# Altium PCB Relay Board PCB.PcbDoc
Units mm, origin at the board's own origin, x right, y up, seen from the top; angles counter-clockwise.
Board outline 51 x 30 mm, 2 copper layers (Top Layer, Bottom Layer); 4 components, 4 nets, 10 pads, 0 vias.
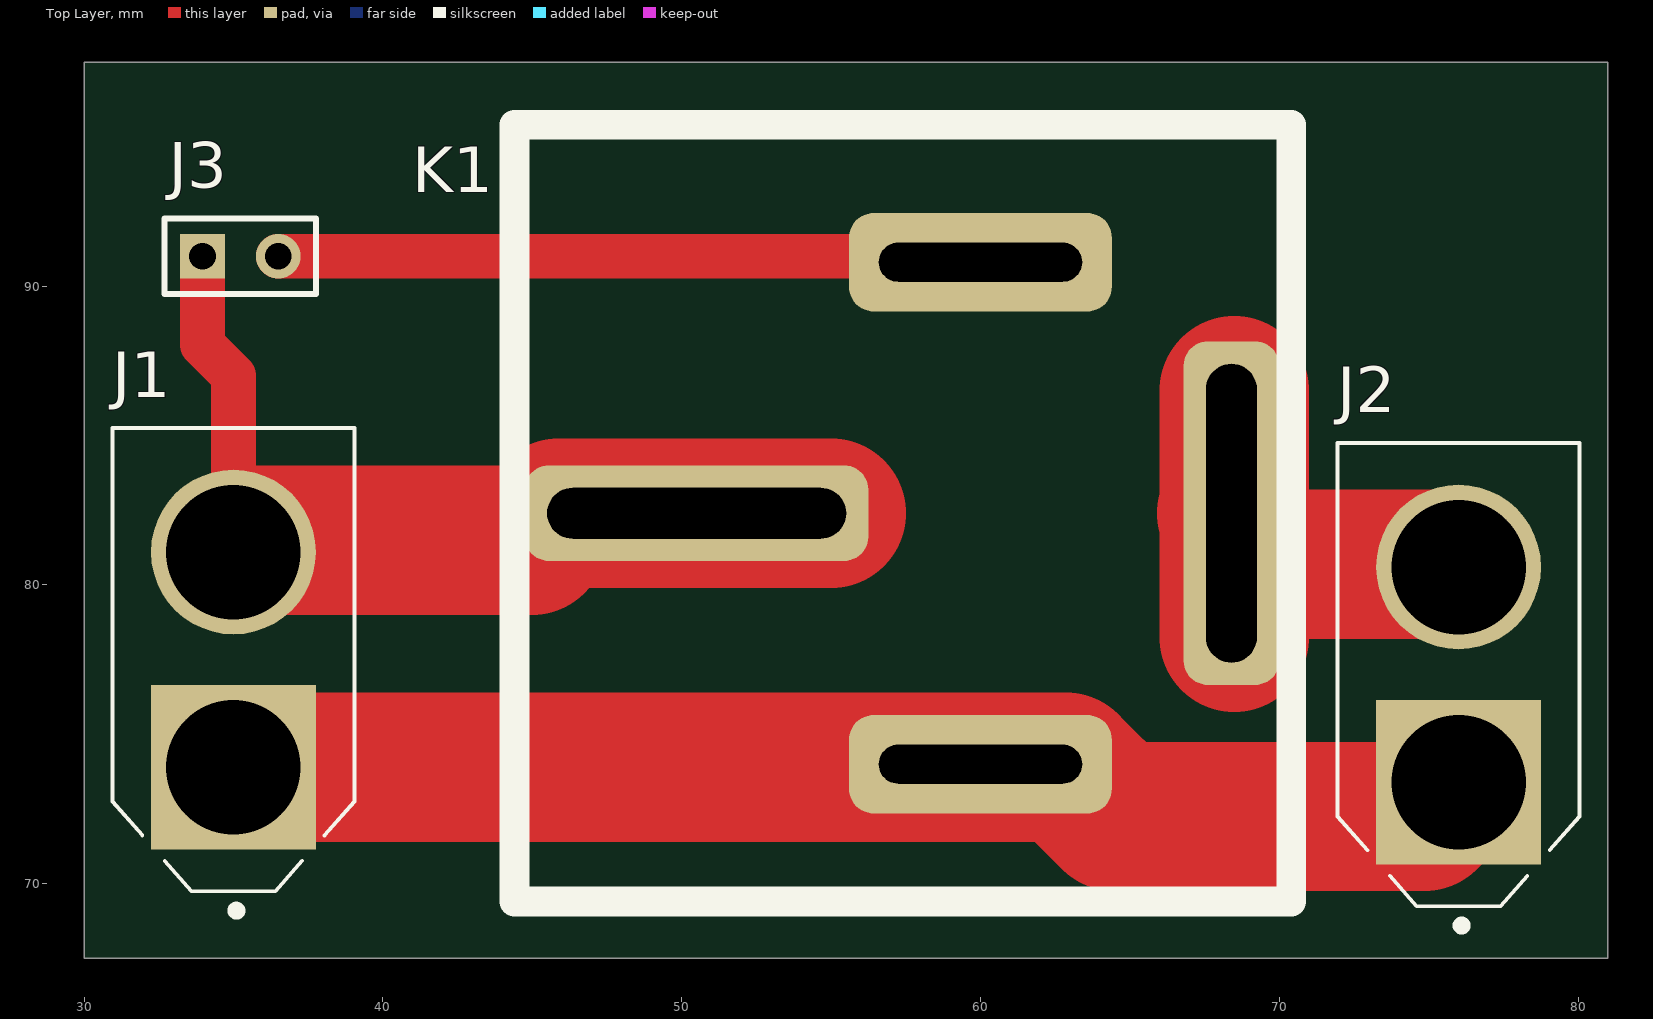
[diagram p0: Top Layer view]
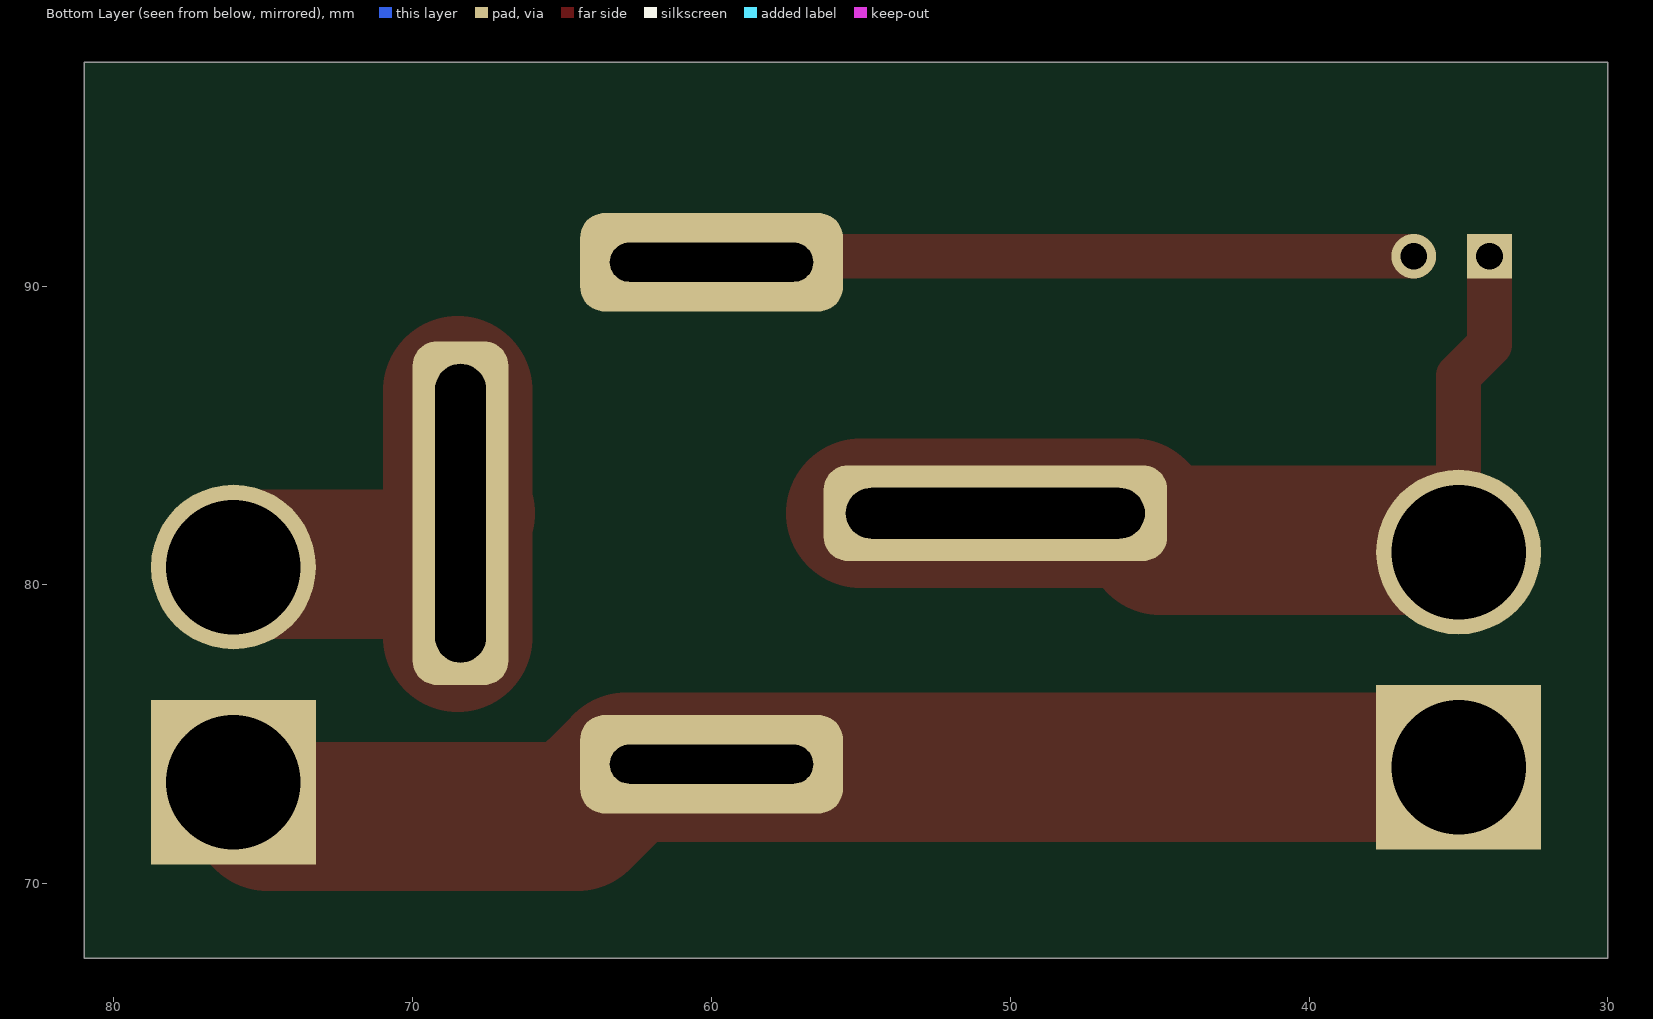
[diagram p1: Bottom Layer view, seen from below]
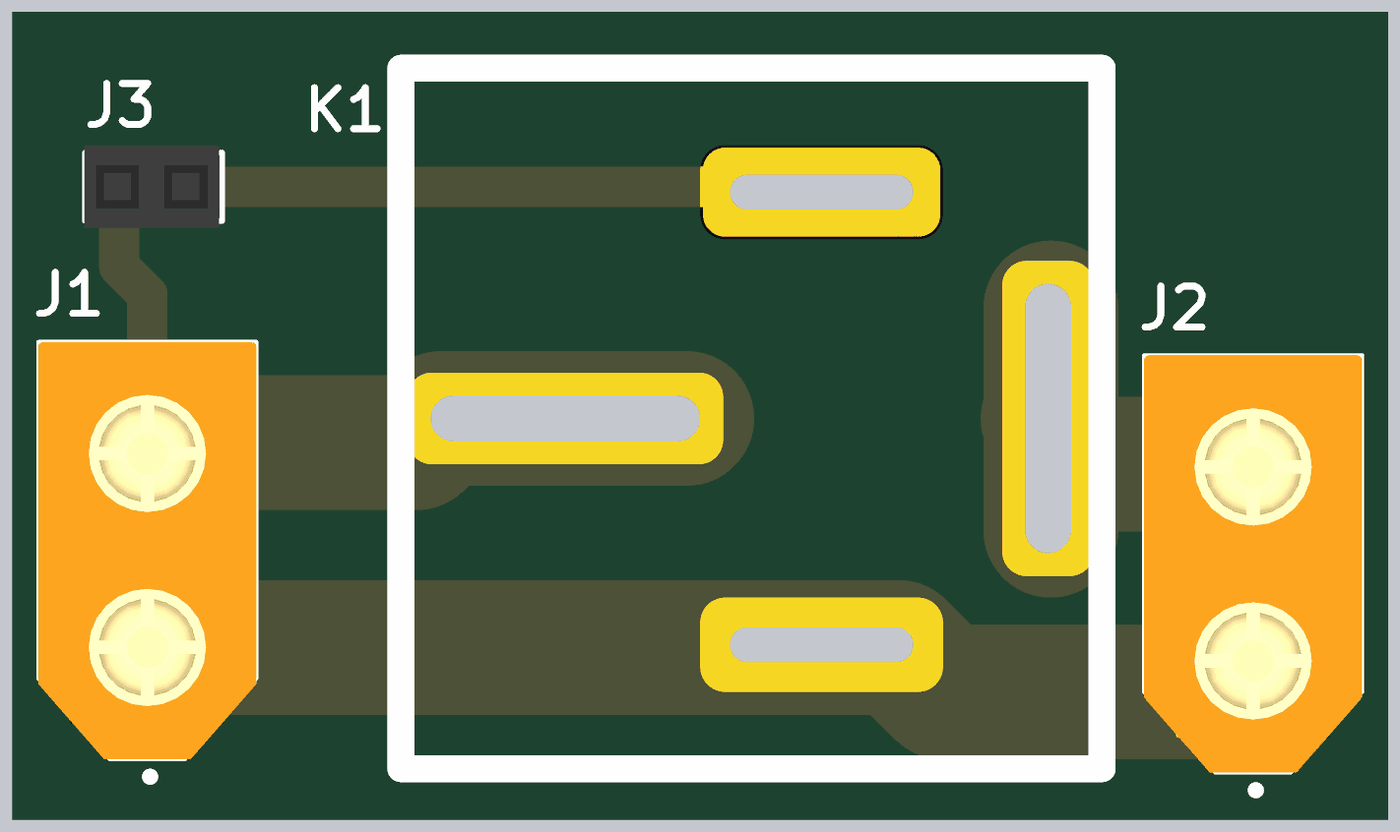
[diagram p2: 3D render of the assembled board from above, using the file's embedded part models]

## Layer stack, top to bottom
Top Solder: solder mask 0.0102, Solder Resist, Dk 3.5
Top Layer: signal copper 0.0356
Dielectric 1: dielectric 0.32, FR-4, Dk 4.8
Bottom Layer: signal copper 0.0356
Bottom Solder: solder mask 0.0102, Solder Resist, Dk 3.5

## Board outline
30,67.5 30,97.5 81,97.5 81,67.5

## Design rules (kind name [scope] priority, off if disabled: settings)
Clearance [All] p1: gap=0.254 ignorepadtopadclearanceinfootprint=FALSE except(0: Arc-Hole Track-Hole SMDPad-Hole THPad-Hole Via-Hole Fill-Hole Poly-Hole Region-Hole Text-Hole)
Height [All] p1: minheight=0 maxheight=50.8 prefheight=12.7
PolygonConnect [All] p1: connectstyle=Direct reliefconductorwidth=0.254 reliefentries=4 polygonreliefangle="90 Angle" airgapwidth=0.254
RoutingVias [All] p1: holewidth=0.711 width=1.27 viastyle="Through Hole" minholewidth=0.711 minwidth=1.27 maxholewidth=0.711 maxwidth=1.27
SolderMaskExpansion [All] p1: expansion=0.102 istentingtop=FALSE
Width [All] p1: maxlimit=10 minlimit=1 preferedwidth=3
29 further rules are at their usual default settings.

## Components (designator, comment, footprint, x,y, rotation, side; value= is the part's Value field where it differs from the comment)
J1 "CONN_XT60" XT60_CONN 35,77.5 r90 top
J2 "CONN_XT60" XT60_CONN 76,77 r90 top
J3 "CONN_HDR_1X2" HDR1X2 33.96,91 r0 top
K1 "RLY_ELO_MINI_POWER_RELAY_24V_70A" ELO_MINI_POWER_RELAY 68.4,82.4 r90 top

## Footprints (in the part's own frame and the unit in brackets; to place one, negate y for a bottom-side part, rotate by r counter-clockwise, add the part's x,y. Pads: shape width x height; smd on the part's side, far side on the other; paste and mask are expansions set on the pad)
ELO_MINI_POWER_RELAY [mm]
  rrect50% 3.2x11.5 hole 1.7 slot 10 at 90 deg: 30(0,17.9)
  rrect50% 3.3x8.8 hole 1.3 slot 6.8 at 90 deg: 85(-8.4,8.4) 86(8.4,8.4)
  rrect50% 11.5x3.2 hole 1.7 slot 10 at 0 deg: 87(0,0)
  silkscreen extent -13,-2 13,24, body extent -13,-2 13,28, height 41.22
HDR1X2 [mm] "Connector; Header; 2 Position"
  rect 1.5x1.5 hole 0.9: 1(0,0)
  round 1.5 hole 0.9: 2(2.54,0)
  silkscreen extent -1.27,-1.27 3.81,1.27, body extent -1.3,-1.52 3.7,1.52, height 8.5
XT60_CONN [mm]
  rect 5.516x5.516 hole 4.5: 1(-3.6,0)
  round 5.516 hole 4.5: 2(3.6,0)
  silkscreen extent -8.55,-4.05 7.75,4.05, body extent -7.75,-4.05 7.75,4.05, height 15.88

## Part data
J1 J2: "XT60 Connectors Male/female Pair", Manufacturer=SparkFun, Manufacturer Part Number=PRT-10474, Supplier Part Number 1=1568-1816-ND, ComponentLink1Description=https://cdn.sparkfun.com/datasheets/Prototyping/xt60.pdf?src-supplier=Digi-Key, ComponentLink1URL=https://cdn.sparkfun.com/datasheets/Prototyping/xt60.pdf?src-supplier=Digi-Key, Pricing 1="1=1,50000 (USD)", RoHS=No, Stock 1=2196, Supplier 1=Digi-Key
J3: "Header, 2-Pin", LatestRevisionDate=17-Jul-2002, LatestRevisionNote="Re-released for DXP Platform.", Publisher="Altium Limited"

## Nets (pads, with @x,y where several pads share a name; then routed paths per layer and width w, separated by ;. In a path a pad name is that pad's centre, name@x,y a point inside that pad or via, vN(x,y) a via of type N, cw(c..) or ccw(c..) an arc to the next point about the centre after c; other vN are vias at no path point)
GND: J1.1 J2.1 K1.85 | length 42.2
  Top Layer w5: J1.1 62.85,73.9 64.5,72.25 74.85,72.25 J2.1
NetJ3_2: J3.2 K1.86 | length 25.5
  Top Layer w1.5: J3.2 K1.86@61.9,91
  Top Layer w2: K1.86@61.9,91 K1.86@62,90.9
VBAT+: J1.2 J3.1 K1.30 | length 30.9
  Top Layer w1.5: J3.1 33.96,88.04 35,87 J1.2
  Top Layer w5: J1.2 35.14,81.1 35.54,81.5 44.981,81.5 45.881,82.4 K1.30 K1.30@55,82.4
VBAT-: J2.2 K1.87 | length 16.2
  Top Layer w5: K1.87@68.5,78.25 K1.87@68.5,81.499 ; K1.87@68.5,86.5 68.5,82.5 K1.87 68.5,82.3 K1.87@68.5,81.499 ; J2.2 75.901,80.699 69.3,80.699 K1.87@68.5,81.499

## Silkscreen, mask and mechanical layers (free items; w line width, h text height)
Mechanical 15:
  the board outline again, w0.5